# EAGLE board Kitty_PCB (EAGLE 9.2.2)
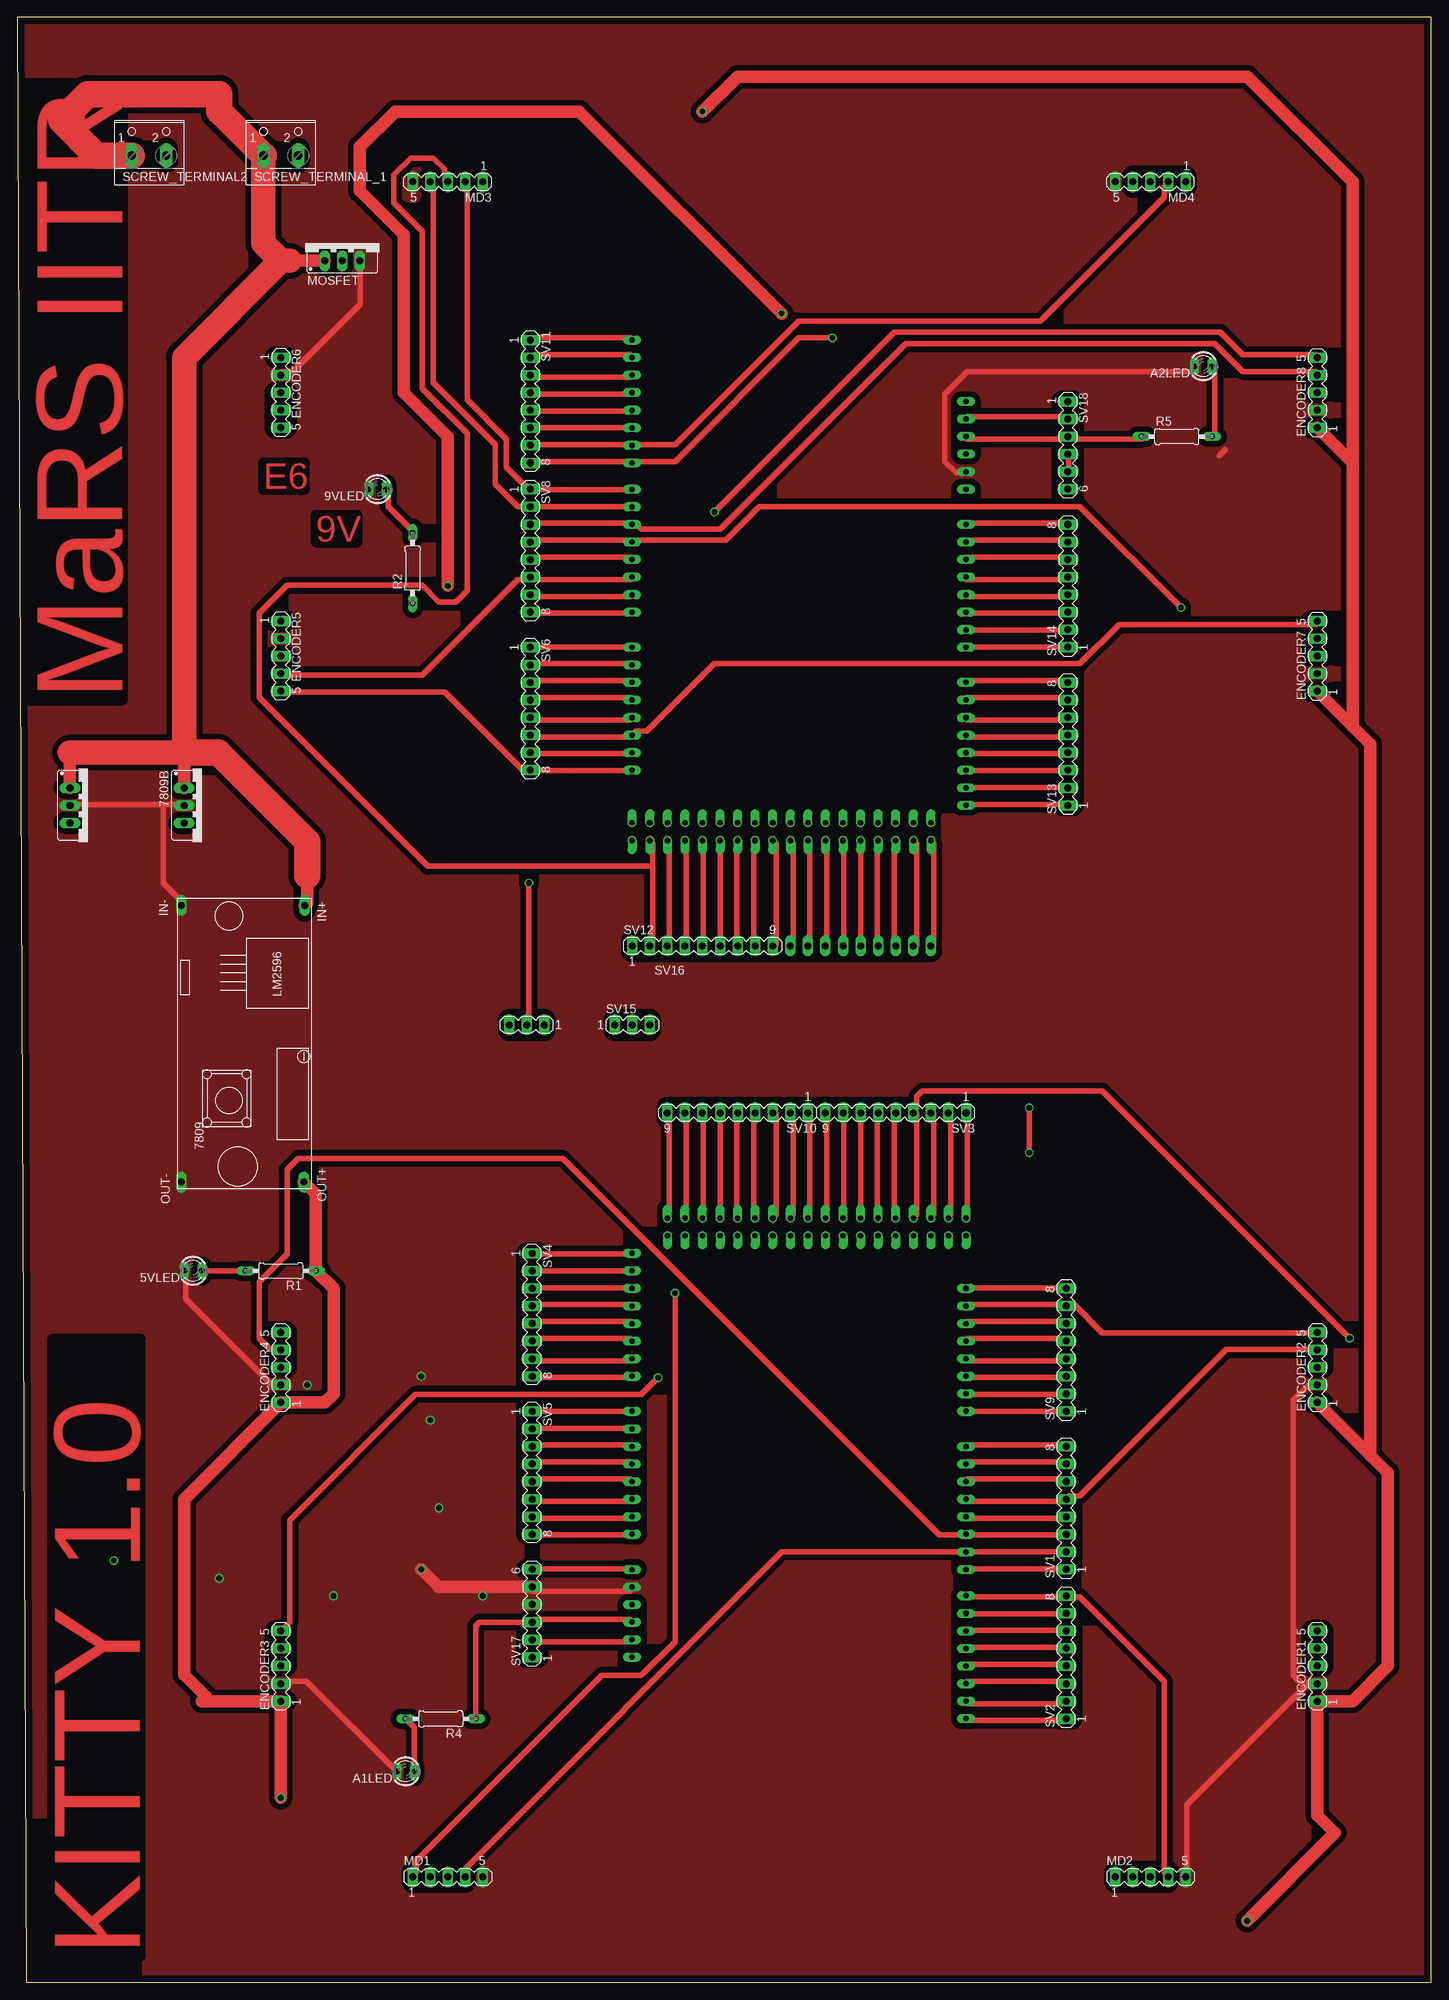
[diagram p0: board, top side]
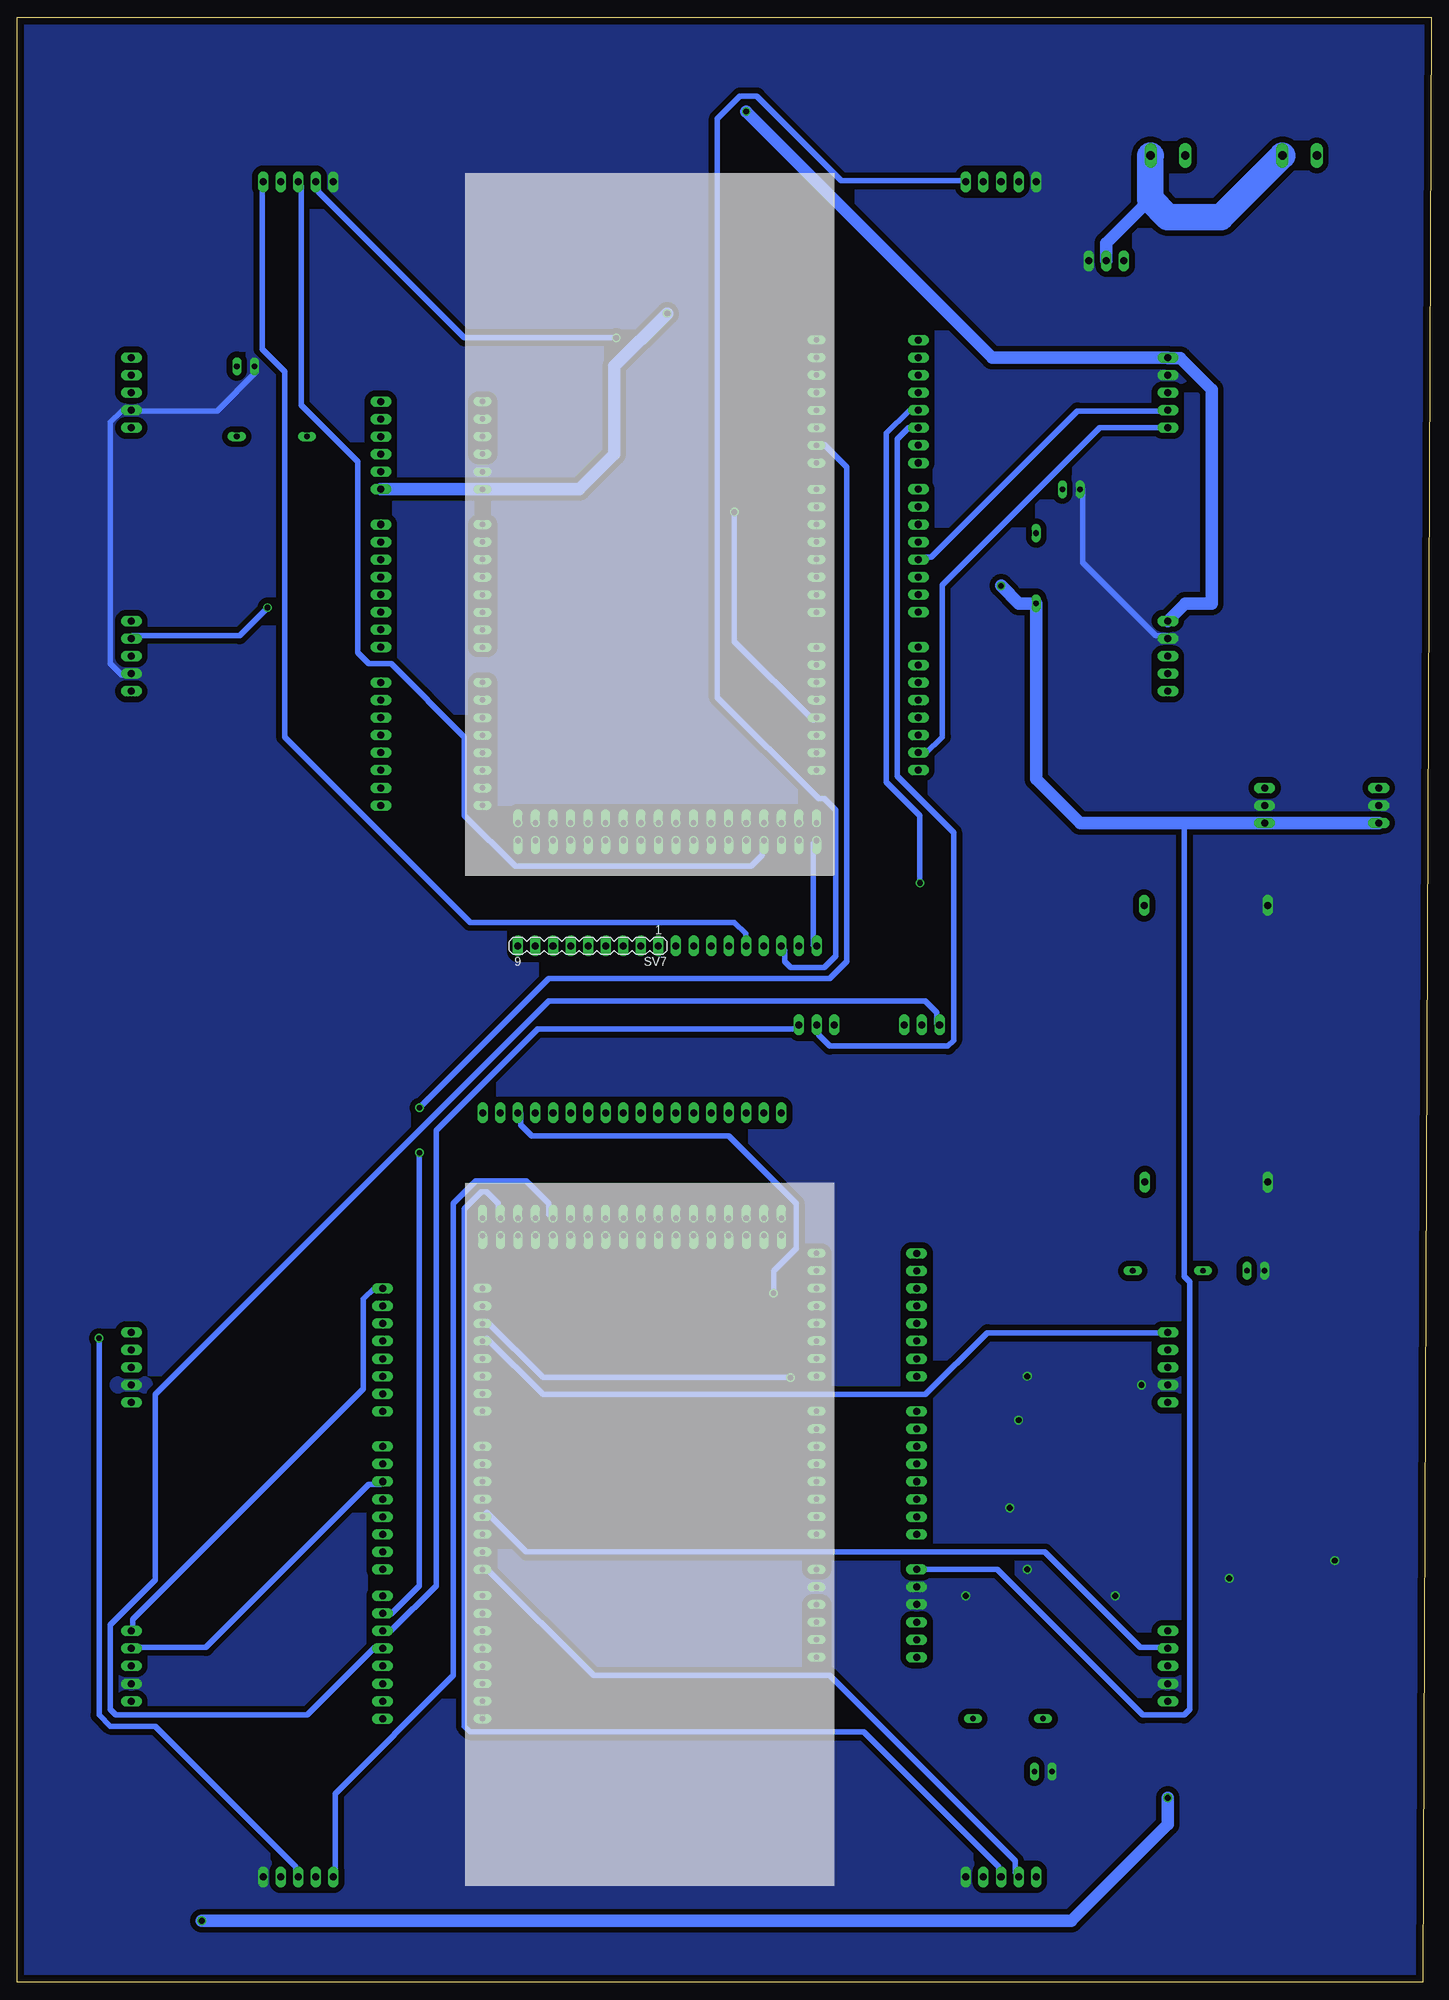
[diagram p1: board, bottom side, seen from below]

Size 204.45 x 284.15 mm. Coordinates in mm from the lower left corner, seen from the top.
Outline: 1.27,0 204.45,0 204.45,284.15 0,284.15 1.27,0
Copper layers (1*16): Top 0.035mm / dielectric 1.5mm / Bottom 0.035mm
Design rules "default *": minimum track width 10mil, minimum drill 24mil, track to track 8mil, track to pad 8mil, pad to pad 8mil, via to via 8mil, smd to smd 8mil, copper to edge 40mil, drill to drill 8mil, minimum pad ring 10mil, minimum via ring 8mil, stop-mask expansion 4mil, vias tented up to drill 0mil, thermal gap 10mil
Net classes: 0 default: width 0.813 mm, drill 0.813 mm, clearance 0.813 mm

## Footprints (pad centres in the part's own frame; a part is rotated, then mirrored left to right if it is on the bottom)
LED3MM = drill 0.813 long: A -1.27,0; K 1.27,0
78XXS = drill 1.016 long: GND 0,-2.54; IN -2.54,-2.54; OUT 2.54,-2.54
MEGABOX = drill 0.8 long: 0 12.7,24.13; 1 10.16,24.13; 2 7.62,24.13; 3 5.08,24.13; 3V3 -15.24,-24.13; 4 2.54,24.13; 5 0,24.13; 5V -12.7,-24.13; 6 -2.54,24.13; 7 -5.08,24.13; 8 -8.89,24.13; 9 -11.43,24.13; 10 -13.97,24.13; 11 -16.51,24.13; 12 -19.05,24.13; 13 -21.59,24.13; 14 17.78,24.13; 15 20.32,24.13; 16 22.86,24.13; 17 25.4,24.13; 18 27.94,24.13; 19 30.48,24.13; 20 33.02,24.13; 21 35.56,24.13; A0 0,-24.13; A1 2.54,-24.13; A2 5.08,-24.13; A3 7.62,-24.13; A4 10.16,-24.13; A5 12.7,-24.13; A6 15.24,-24.13; A7 17.78,-24.13; A8 22.86,-24.13; A9 25.4,-24.13; A10 27.94,-24.13; A11 30.48,-24.13; A12 33.02,-24.13; A13 35.56,-24.13; A14 38.1,-24.13; A15 40.64,-24.13; AREF -26.67,24.13; GND@1 -24.13,24.13; GND@2 -10.16,-24.13; GND@3 -7.62,-24.13; RESET -17.78,-24.13; VIN -5.08,-24.13 | drill 0.8 offset: 22 43.18,21.59; 23 45.72,21.59; 24 43.18,19.05; 25 45.72,19.05; 26 43.18,16.51; 27 45.72,16.51; 28 43.18,13.97; 29 45.72,13.97; 30 43.18,11.43; 31 45.72,11.43; 32 43.18,8.89; 33 45.72,8.89; 34 43.18,6.35; 35 45.72,6.35; 36 43.18,3.81; 37 45.72,3.81; 38 43.18,1.27; 39 45.72,1.27; 40 43.18,-1.27; 41 45.72,-1.27; 42 43.18,-3.81; 43 45.72,-3.81; 44 43.18,-6.35; 45 45.72,-6.35; 46 43.18,-8.89; 47 45.72,-8.89; 48 43.18,-11.43; 49 45.72,-11.43; 50 43.18,-13.97; 51 45.72,-13.97; 52 43.18,-16.51; 53 45.72,-16.51; GND@4 43.18,24.13; GND@5 45.72,24.13; GND@6 43.18,-19.05; GND@7 45.72,-19.05
MA05-1 = drill 1.016 long: 1 -5.08,0; 2 -2.54,0; 3 0,0; 4 2.54,0; 5 5.08,0
0207/10 = drill 0.813 long: 1 -5.08,0; 2 5.08,0
POWER_CONNECTOR = drill 1.194 long: 1 -2.5,-1.27; 2 2.5,-1.27
MA08-1 = drill 1.016 long: 1 -8.89,0; 2 -6.35,0; 3 -3.81,0; 4 -1.27,0; 5 1.27,0; 6 3.81,0; 7 6.35,0; 8 8.89,0
MA09-1 = drill 1.016 long: 1 -10.16,0; 2 -7.62,0; 3 -5.08,0; 4 -2.54,0; 5 0,0; 6 2.54,0; 7 5.08,0; 8 7.62,0; 9 10.16,0
MA03-1 = drill 1.016 long: 1 -2.54,0; 2 0,0; 3 2.54,0
MA06-1 = drill 1.016 long: 1 -6.35,0; 2 -3.81,0; 3 -1.27,0; 4 1.27,0; 5 3.81,0; 6 6.35,0
BUCK_CONVERTER = drill 1.016 long: IN+ -18.558,7.255; IN- -18.558,-10.618; OUT+ 21.442,7.128; OUT- 21.442,-10.618

## Placement (x,y rotation side)
5VLED  LED  [LED3MM]  25.4,102.87 180 top
9VLED  LED  [LED3MM]  52.07,215.9 180 top
7809  [78XXS]  10.16,170.18 270 top
7809B  [78XXS]  26.67,170.18 270 top
A1LED  LED  [LED3MM]  56.13,30.48 180 top
A2LED  LED  [LED3MM]  171.45,233.68 180 top
ARDUINO1  MEGA_DEVICE  [MEGABOX]  113.03,64.77 90 bottom
ARDUINO2  MEGA_DEVICE  [MEGABOX]  113.03,210.82 270 bottom
ENCODER1  [MA05-1]  187.96,45.72 90 top
ENCODER2  [MA05-1]  187.96,88.9 90 top
ENCODER3  [MA05-1]  38.1,45.72 90 top
ENCODER4  [MA05-1]  38.1,88.9 90 top
ENCODER5  [MA05-1]  38.1,191.77 270 top
ENCODER6  [MA05-1]  38.1,229.87 270 top
ENCODER7  [MA05-1]  187.96,191.77 90 top
ENCODER8  [MA05-1]  187.96,229.87 90 top
MD1  [MA05-1]  62.23,15.24 0 top
MD2  [MA05-1]  163.83,15.24 0 top
MD3  [MA05-1]  62.23,260.35 180 top
MD4  [MA05-1]  163.83,260.35 180 top
MOSFET  [78XXS]  46.99,251.46 0 top
R1  [0207/10]  38.1,102.87 180 top
R2  [0207/10]  57.15,204.47 90 top
R4  [0207/10]  61.21,38.1 180 top
R5  [0207/10]  167.64,223.52 0 top
SCREW_TERMINAL2  [POWER_CONNECTOR]  19.05,265.43 0 top
SCREW_TERMINAL_1  [POWER_CONNECTOR]  38.1,265.43 0 top
SV1  [MA08-1]  151.64,68.58 90 top
SV2  [MA08-1]  151.64,46.99 90 top
SV3  [MA09-1]  127,125.73 180 top
SV4  [MA08-1]  74.42,96.52 270 top
SV5  [MA08-1]  74.42,73.66 270 top
SV6  [MA08-1]  74.17,184.15 270 top
SV7  [MA09-1]  121.92,149.86 180 bottom
SV8  [MA08-1]  74.17,207.01 270 top
SV9  [MA08-1]  151.64,91.44 90 top
SV10  [MA09-1]  104.14,125.73 180 top
SV11  [MA08-1]  74.17,228.6 270 top
SV12  [MA09-1]  99.06,149.86 0 top
SV13  [MA08-1]  151.89,179.07 90 top
SV14  [MA08-1]  151.89,201.93 90 top
SV15  [MA03-1]  88.9,138.43 0 top
SV16  [MA03-1]  73.66,138.43 180 top
SV17  [MA06-1]  74.42,53.34 90 top
SV18  [MA06-1]  151.89,222.25 270 top
U$1  [BUCK_CONVERTER]  34.29,137.16 270 top

## Library data of the parts
5VLED 9VLED A1LED A2LED = robocon; MF: VISHAY SEMICONDUCTOR; OC_FARNELL: 1612437
7809 7809B MOSFET R1 R2 R4 R5 U$1 = robocon
ARDUINO1 ARDUINO2 = ArduinoMegaSymbol
ENCODER1-ENCODER8 MD1-MD4 SV1-SV18 = robocon; OC_FARNELL: unknown; OC_NEWARK: unknown
SCREW_TERMINAL2 SCREW_TERMINAL_1 = robocon; MPN: 237-102; OC_FARNELL: unknown; OC_NEWARK: 70K9898

## Nets
0A1: ARDUINO1.0 SV1.8
0A2: ARDUINO2.0 SV8.8
1A1: ARDUINO1.1 SV1.7
1A2: ARDUINO2.1 SV8.7
2A1: ARDUINO1.2 ENCODER1.4 SV1.6
2A2: ARDUINO2.2 ENCODER5.4 SV8.6
3A1: ARDUINO1.3 ENCODER2.4 SV1.5
3A2: ARDUINO2.3 ENCODER6.4 SV8.5
4A1: ARDUINO1.4 ENCODER3.4 SV1.4
4A2: ARDUINO2.4 ENCODER7.4 SV8.4
5A1: ARDUINO1.5 ENCODER4.4 SV1.3
5A2: ARDUINO2.5 ENCODER8.4 SV8.3
5V: ENCODER1.1 ENCODER2.1 ENCODER3.1 ENCODER4.1 ENCODER5.1 ENCODER6.1 ENCODER7.1 ENCODER8.1 R1.1 U$1.OUT+
6A1: ARDUINO1.6 MD1.4 SV1.2
6A2: ARDUINO2.6 MD3.4 SV8.2
7A1: ARDUINO1.7 MD1.2 SV1.1
7A2: ARDUINO2.7 MD3.2 SV8.1
8A1: ARDUINO1.8 MD2.4 SV2.8
8A2: ARDUINO2.8 MD4.4 SV11.8
9A1: MD2.2
9A2: ARDUINO1.9 ARDUINO2.9 MD4.2 SV2.7 SV11.7
9V: 7809.OUT 7809B.OUT ARDUINO1.VIN ARDUINO2.VIN R2.1 SV17.6 SV18.6
12A1: ARDUINO1.12 SV2.4
12A2: ARDUINO2.12 SV11.4
12V_IN_GND: MOSFET.GND SCREW_TERMINAL2.2 SCREW_TERMINAL_1.2
12V_OUT: 7809.IN 7809B.IN MOSFET.IN SCREW_TERMINAL2.1 SCREW_TERMINAL_1.1 U$1.IN+
13A1: ARDUINO1.13 SV2.3
13A2: ARDUINO2.13 SV11.3
14A1: ARDUINO1.14 SV9.1
14A2: ARDUINO2.14 SV6.1
15A1: ARDUINO1.15 SV9.2
15A2: ARDUINO2.15 SV6.2
16A1: ARDUINO1.16 SV9.3
16A2: ARDUINO2.16 SV6.3
17A1: ARDUINO1.17 SV9.4
17A2: ARDUINO2.17 SV6.4
18A1: ARDUINO1.18 ENCODER4.5 SV9.5
18A2: ARDUINO2.18 ENCODER8.5 SV6.5
19A1: ARDUINO1.19 ENCODER3.5 SV9.6
19A2: ARDUINO2.19 ENCODER7.5 SV6.6
20A1: ARDUINO1.20 ENCODER2.5 SV9.7
20A2: ARDUINO2.20 ENCODER6.5 SV6.7
21A1: ARDUINO1.21 ENCODER1.5 SV9.8
21A2: ARDUINO2.21 ENCODER5.5 SV6.8
23A1: ARDUINO1.23 MD1.3 SV3.2
23A2: ARDUINO2.23 MD3.3 SV12.2
25A1: ARDUINO1.25 MD1.1 SV3.3
25A2: ARDUINO2.25 MD3.1 SV12.3
27A1: ARDUINO1.27 MD2.3 SV3.4
27A2: ARDUINO2.27 MD4.3 SV12.4
29A1: ARDUINO1.29 MD2.1 SV3.5
29A2: ARDUINO2.29 MD4.1 SV12.5
31A1: ARDUINO1.31 SV3.6
31A2: ARDUINO2.31 SV12.6
33A1: ARDUINO1.33 SV3.7
33A2: ARDUINO2.33 SV12.7
35A1: ARDUINO1.35 SV3.8
35A2: ARDUINO2.35 SV12.8
37A1: ARDUINO1.37 SV3.9
37A2: ARDUINO2.37 SV12.9
A1SC1: ARDUINO1.10 SV2.6 SV15.3
A1SC2: ARDUINO1.11 SV2.5 SV16.3
A2SC1: ARDUINO2.10 SV11.6 SV15.2
A2SC2: ARDUINO2.11 SV11.5 SV16.2
GND: 5VLED.K 9VLED.K 7809.GND 7809B.GND A1LED.K A2LED.K ARDUINO1.GND@3 ARDUINO2.GND@3 ENCODER1.2 ENCODER2.2 ENCODER3.2 ENCODER4.2 ENCODER5.2 ENCODER6.2 ENCODER7.2 ENCODER8.2 MD1.5 MD2.5 MD3.5 MD4.5 MOSFET.OUT SV17.4 SV17.5 U$1.IN- U$1.OUT-
N$1: ARDUINO1.3V3 SV17.2
N$2: ARDUINO1.5V R4.1 SV17.3
N$3: 5VLED.A R1.2
N$4: SV18.4 SV18.5
N$5: ARDUINO2.3V3 SV18.2
N$6: ARDUINO2.5V R5.1 SV18.3
N$7: A1LED.A R4.2
N$8: A2LED.A R5.2
N$19: 9VLED.A R2.2
N$20: ARDUINO1.GND@5 SV3.1
N$24: ARDUINO1.GND@1 SV2.2
N$25: ARDUINO1.AREF SV2.1
N$26: ARDUINO1.A15 SV4.1
N$27: ARDUINO1.A14 SV4.2
N$28: ARDUINO1.A13 SV4.3
N$29: ARDUINO1.A12 SV4.4
N$30: ARDUINO1.A11 SV4.5
N$31: ARDUINO1.A10 SV4.6
N$32: ARDUINO1.A9 SV4.7
N$33: ARDUINO1.A8 SV4.8
N$34: ARDUINO1.A7 SV5.1
N$35: ARDUINO1.A6 SV5.2
N$36: ARDUINO1.A5 SV5.3
N$37: ARDUINO1.A4 SV5.4
N$38: ARDUINO1.A3 SV5.5
N$39: ARDUINO1.A2 SV5.6
N$40: ARDUINO1.A1 SV5.7
N$41: ARDUINO1.A0 SV5.8
N$59: SV15.1
N$64: ARDUINO2.GND@1 SV11.2
N$65: ARDUINO2.AREF SV11.1
N$66: ARDUINO2.A15 SV13.1
N$67: ARDUINO2.A14 SV13.2
N$68: ARDUINO2.A13 SV13.3
N$69: ARDUINO2.A12 SV13.4
N$70: ARDUINO2.A11 SV13.5
N$71: ARDUINO2.A10 SV13.6
N$72: ARDUINO2.A9 SV13.7
N$73: ARDUINO2.A8 SV13.8
N$74: ARDUINO2.A7 SV14.1
N$75: ARDUINO2.A6 SV14.2
N$76: ARDUINO2.A5 SV14.3
N$77: ARDUINO2.A4 SV14.4
N$78: ARDUINO2.A3 SV14.5
N$79: ARDUINO2.A2 SV14.6
N$80: ARDUINO2.A1 SV14.7
N$81: ARDUINO2.A0 SV14.8
N$82: SV16.1
N$88: ARDUINO1.39 SV10.1
N$89: ARDUINO1.41 SV10.2
N$90: ARDUINO1.43 SV10.3
N$91: ARDUINO1.45 SV10.4
N$92: ARDUINO1.47 SV10.5
N$93: ARDUINO1.49 SV10.6
N$94: ARDUINO1.51 SV10.7
N$95: ARDUINO1.53 SV10.8
N$96: ARDUINO1.GND@7 SV10.9
N$97: ARDUINO2.GND@5 SV12.1
N$106: ARDUINO2.39 SV7.1
N$107: ARDUINO2.41 SV7.2
N$108: ARDUINO2.43 SV7.3
N$109: ARDUINO2.45 SV7.4
N$110: ARDUINO2.47 SV7.5
N$111: ARDUINO2.49 SV7.6
N$112: ARDUINO2.51 SV7.7
N$113: ARDUINO2.53 SV7.8
N$114: ARDUINO2.GND@7 SV7.9
N$118: ENCODER1.3
N$122: ENCODER2.3
N$126: ENCODER4.3
N$130: ENCODER3.3

## Tracks (layer width: path | path; a pad name or v marks a point on that pad's centre or on a via)
0A1
  Top 0.813: ARDUINO1.0 137.36,77.67 151.18,77.67 SV1.8
0A2
  Top 0.813: ARDUINO2.0 88.59,197.97 74.78,197.97 SV8.8
1A1
  Top 0.813: ARDUINO1.1 137.36,75.24 151.18,75.24 SV1.7
1A2
  Top 0.813: ARDUINO2.1 88.59,200.41 74.78,200.41 SV8.7
2A1
  Top 0.813: ARDUINO1.2 137.36,72.8 151.18,72.8 SV1.6
  Bottom 0.813: ENCODER1.4 187.76,48.41 177.19,48.41 153.62,71.98 151.99,71.98 SV1.6
2A2
  Top 0.813: ARDUINO2.2 88.59,202.84 74.78,202.84 SV8.6 73.97,202.84 72.34,202.84 58.52,189.03 38.2,189.03 ENCODER5.4
3A1
  Top 0.813: ARDUINO1.3 137.36,69.55 151.18,69.55 SV1.5 151.99,70.36 153.62,70.36 174.75,91.49 187.76,91.49 ENCODER2.4
3A2
  Top 0.813: ARDUINO2.3 88.59,206.1 74.78,206.1 SV8.5
  Bottom 0.813: ENCODER6.4 38.2,227.23 51.21,227.23 72.34,206.1 73.97,206.1 SV8.5
4A1
  Top 0.813: ARDUINO1.4 137.36,67.11 151.18,67.11 SV1.4
  Bottom 0.813: ENCODER3.4 38.2,48.41 42.06,48.41 55.88,62.23 130.86,62.23 136.55,67.92 ARDUINO1.4
4A2  (via drill 0.81)
  Top 0.813: SV8.4 74.78,208.53 88.59,208.53 ARDUINO2.4 89.41,208.53 102.41,208.53 107.29,213.41 153.62,213.41 v168.25,198.78
  Bottom 0.813: v168.25,198.78 172.31,194.72 187.76,194.72 ENCODER7.4
5A1
  Top 0.813: SV1.3 151.18,64.67 137.36,64.67 ARDUINO1.5 136.55,64.67 133.3,64.67 78.84,119.13 40.64,119.13 39.01,117.5 39.01,105.31 34.95,101.24 34.95,93.12 36.58,91.49 37.39,91.49 ENCODER4.4
5A2
  Top 0.813: SV8.3 74.78,210.97 88.59,210.97 ARDUINO2.5 89.41,210.97 90.22,210.16 101.6,210.16 128.42,236.98 173.13,236.98 177.19,232.92 187.76,232.92 ENCODER8.4
5V  (via drill 0.81, 0.85)
  Top 1.778: U$1.OUT+ 43.18,113.96 R1.1 45.72,100.33 45.72,85.09 44.45,83.82 ENCODER4.1 24.13,69.85 24.13,44.45 27.3,41.28 26.67,40.64 ENCODER3.1 v38.1,26.67 | v177.8,8.89 190.5,21.59 187.96,24.13 ENCODER1.1 193.04,40.64 198.12,45.72 198.12,73.66 195.58,76.2 | 195.58,76.2 ENCODER2.1 | 195.58,76.2 195.58,179.07 193.04,181.61 | 193.04,181.61 ENCODER7.1 | 193.04,181.61 193.04,219.71 | 193.04,219.71 ENCODER8.1 | 193.04,219.71 193.04,260.35 177.8,275.59 104.14,275.59 v99.06,270.51
  Bottom 1.778: v177.8,8.89 52.07,8.89 38.1,22.86 v38.1,26.67 | v99.06,270.51 63.5,234.95 ENCODER6.1 38.02,234.87 36.32,234.87 31.75,230.31 31.75,199.39 35.56,199.39 ENCODER5.1
6A1
  Top 0.813: SV1.2 ARDUINO1.6 110.54,62.23 65.02,16.71 65.02,15.9 MD1.4
6A2
  Top 0.813: ARDUINO2.6 88.59,213.41 74.78,213.41 SV8.2 73.97,213.41 72.34,213.41 69.09,216.66 69.09,222.35 60.15,231.29 60.15,259.74 MD3.4
7A1
  Top 0.813: ARDUINO1.7 137.36,59.79 151.18,59.79 SV1.1
  Bottom 0.813: MD1.2 60.15,15.9 60.15,17.53 86.97,44.35 121.11,44.35 136.55,59.79 ARDUINO1.7
7A2
  Top 0.813: ARDUINO2.7 88.59,215.85 74.78,215.85 SV8.1 73.97,215.85 70.71,219.1 70.71,223.16 65.02,228.85 65.02,259.74 MD3.2
8A1
  Top 0.813: ARDUINO1.8 137.36,55.73 151.18,55.73 SV2.8 151.99,55.73 153.62,55.73 165.81,43.54 165.81,15.9 MD2.4
8A2  (via drill 0.81)
  Top 0.813: SV11.8 74.78,219.91 88.59,219.91 ARDUINO2.8 89.41,219.91 95.1,219.91 112.98,237.8 v117.86,237.8
  Bottom 0.813: v117.86,237.8 139.8,237.8 160.93,258.93 160.93,259.74 MD4.4
9A2  (via drill 0.81)
  Top 0.813: ARDUINO1.9 137.36,53.29 151.18,53.29 SV2.7 | SV11.7 74.78,222.35 88.59,222.35 ARDUINO2.9 89.41,222.35 95.1,222.35 112.98,240.23 147.93,240.23 165.81,258.12 165.81,259.74 MD4.2 | v146.3,126.44 v146.3,119.94
  Bottom 0.813: v146.3,119.94 146.3,57.35 150.37,53.29 151.18,53.29 SV2.7 | v146.3,126.44 127.61,145.14 86.97,145.14 84.53,147.57 84.53,219.1 87.78,222.35 88.59,222.35 ARDUINO2.9
9V  (via drill 0.81)
  Top 0.813: ARDUINO1.VIN 88.59,59.79 74.78,59.79 SV17.6
  Top 1.778: v62.23,201.93 62.23,223.52 55.88,229.87 55.88,252.73 49.53,259.08 49.53,265.43 54.61,270.51 81.28,270.51 v110.49,241.3
  Bottom 0.813: SV17.6 62.74,59.69 59.31,56.26 41.71,38.66 35.76,38.66 34.95,39.47 34.95,101.24 35.76,102.06 35.76,167.64
  Bottom 1.778: 7809.OUT 7809B.OUT 35.76,167.64 50.8,167.64 57.15,173.99 R2.1 59.69,199.39 v62.23,201.93 | v110.49,241.3 118.11,233.68 118.11,220.98 123.19,215.9 ARDUINO2.VIN SV18.6
12A1
  Top 0.813: ARDUINO1.12 137.36,45.97 151.18,45.97 SV2.4
12A2
  Top 0.813: ARDUINO2.12 88.59,229.67 74.78,229.67 SV11.4
12V_IN_GND
  Bottom 1.778: 40.64,257.81 46.99,251.46 MOSFET.GND
  Bottom 3.835: SCREW_TERMINAL2.2 30.44,255.27 38.1,255.27 40.64,257.81 40.64,264.12 SCREW_TERMINAL_1.2
12V_OUT
  Top 1.778: 39.37,248.92 MOSFET.IN | 7.62,177.8 7809.IN | 24.13,177.8 7809B.IN | 41.91,160.02 41.91,156.08 U$1.IN+
  Top 3.556: SCREW_TERMINAL_1.1 35.56,264.12 35.56,251.46 38.1,248.92 | 38.1,248.92 39.37,248.92 | 38.1,248.92 24.13,234.95 24.13,177.8 7.62,177.8
  Top 3.81: 24.13,177.8 29.06,177.8 41.91,164.95 41.91,160.02
  Top 3.835: SCREW_TERMINAL2.1 11.43,264.16 6.35,269.24 10.16,273.05 29.21,273.05 29.21,270.55 SCREW_TERMINAL_1.1
13A1
  Top 0.813: ARDUINO1.13 137.36,43.54 151.18,43.54 SV2.3
13A2
  Top 0.813: ARDUINO2.13 88.59,232.11 74.78,232.11 SV11.3
14A1
  Top 0.813: SV9.1 ARDUINO1.14
14A2
  Top 0.813: ARDUINO2.14 88.59,193.09 74.78,193.09 SV6.1
15A1
  Top 0.813: ARDUINO1.15 137.36,84.99 151.18,84.99 SV9.2
15A2
  Top 0.813: ARDUINO2.15 88.59,190.65 74.78,190.65 SV6.2
16A1
  Top 0.813: ARDUINO1.16 137.36,87.43 151.18,87.43 SV9.3
16A2
  Top 0.813: ARDUINO2.16 88.59,188.21 74.78,188.21 SV6.3
17A1
  Top 0.813: ARDUINO1.17 137.36,89.87 151.18,89.87 SV9.4
17A2
  Top 0.813: ARDUINO2.17 88.59,185.78 74.78,185.78 SV6.4
18A1
  Top 0.813: ARDUINO1.18 137.36,93.12 151.18,93.12 SV9.5
  Bottom 0.813: ENCODER4.5 38.2,93.93 64.21,93.93 73.15,84.99 128.42,84.99 136.55,93.12 ARDUINO1.18
18A2  (via drill 0.81)
  Top 0.813: ARDUINO2.18 88.59,182.52 74.78,182.52 SV6.5 | v100.79,212.6 126.8,238.61 173.94,238.61 177.19,235.36 187.76,235.36 ENCODER8.5
  Bottom 0.813: v100.79,212.6 100.79,193.9 89.41,182.52 ARDUINO2.18
19A1  (via drill 0.81)
  Top 0.813: ARDUINO1.19 137.36,95.56 151.18,95.56 SV9.6 | ENCODER3.5 39.37,52.07 39.37,66.8 57.56,84.99 90.22,84.99 v92.66,87.43
  Bottom 0.813: v92.66,87.43 128.42,87.43 136.55,95.56 ARDUINO1.19
19A2
  Top 0.813: SV6.6 74.78,180.09 88.59,180.09 ARDUINO2.19 89.41,180.9 91.03,180.9 100.79,190.65 153.62,190.65 159.31,196.34 187.76,196.34 ENCODER7.5
20A1
  Top 0.813: ARDUINO1.20 137.36,97.99 151.18,97.99 SV9.7 151.99,97.99 152.81,97.99 156.87,93.93 187.76,93.93 ENCODER2.5
20A2
  Top 0.813: ARDUINO2.20 88.59,177.65 74.78,177.65 SV6.7
  Bottom 0.813: ENCODER6.5 47.95,224.79 70.71,202.03 70.71,180.09 73.15,177.65 73.97,177.65 SV6.7
21A1
  Top 0.813: ARDUINO1.21 137.36,100.43 151.18,100.43 SV9.8
  Bottom 0.813: ENCODER1.5 187.76,50.85 187.76,52.48 154.43,85.8 154.43,98.81 152.81,100.43 151.99,100.43 SV9.8
21A2
  Top 0.813: ARDUINO2.21 88.59,175.21 74.78,175.21 SV6.8 73.97,175.21 73.15,175.21 61.77,186.59 38.2,186.59 ENCODER5.5
23A1
  Top 0.813: ARDUINO1.23 134.93,111 134.93,125.63 SV3.2
  Bottom 0.813: MD1.3 62.59,15.9 62.59,16.71 82.09,36.22 138.99,36.22 139.8,37.03 139.8,111.81 137.36,114.25 136.55,114.25 134.93,112.62 134.93,111 ARDUINO1.23
23A2
  Top 0.813: 91.85,161.39 91.85,150.01 SV12.2 | 91.85,161.39 91.85,164.64 ARDUINO2.23 | 91.85,161.39 59.33,161.39 34.95,185.78 34.95,197.97 39.01,202.03 58.52,202.03 60.96,199.59 63.4,199.59 65.02,201.22 65.02,223.98 58.52,230.48 58.52,253.24 54.46,257.3 54.46,261.37 56.9,263.8 60.15,263.8 61.77,262.18 61.77,260.55 MD3.3
25A1  (via drill 0.81)
  Top 0.813: ARDUINO1.25 132.49,111 132.49,125.63 SV3.3 | v95.1,99.62 95.1,49.22 90.22,44.35 84.53,44.35 57.71,17.53 57.71,15.9 MD1.1
  Bottom 0.813: v95.1,99.62 95.1,102.87 91.85,106.12 91.85,112.62 101.6,122.38 130.05,122.38 131.67,124 131.67,125.63 SV3.3
25A2
  Top 0.813: ARDUINO2.25 94.28,164.64 94.28,150.01 SV12.3
  Bottom 0.813: MD3.1 67.46,260.55 85.34,260.55 97.54,272.75 99.97,272.75 103.23,269.49 103.23,185.78 88.59,171.15 87.78,171.15 86.16,169.52 86.16,148.39 87.78,146.76 92.66,146.76 93.47,147.57 93.47,149.2 SV12.3
27A1  (via drill 0.81)
  Top 0.813: ARDUINO1.27 130.05,111 130.05,125.63 SV3.4 130.05,126.44 130.05,128.07 130.86,128.88 156.87,128.88 v192.63,93.12
  Bottom 0.813: v192.63,93.12 192.63,38.66 191.01,37.03 184.51,37.03 164.19,16.71 164.19,15.9 MD2.3
27A2
  Top 0.813: ARDUINO2.27 96.72,164.64 96.72,150.01 SV12.4
  Bottom 0.813: MD4.3 163.37,259.74 163.37,228.04 155.25,219.91 155.25,192.28 153.62,190.65 150.37,190.65 139.8,180.09 139.8,168.71 132.49,161.39 98.35,161.39 96.72,163.02 96.72,164.64 ARDUINO2.27
29A1
  Top 0.813: ARDUINO1.29 126.8,111 126.8,125.63 SV3.5
  Bottom 0.813: MD2.1 158.5,15.9 158.5,27.28 141.43,44.35 141.43,112.62 138.18,115.88 130.86,115.88 127.61,112.62 127.61,111 ARDUINO1.29
29A2
  Top 0.813: ARDUINO2.29 99.16,164.64 99.16,150.01 SV12.5
  Bottom 0.813: MD4.1 169.06,259.74 169.06,236.17 165.81,232.92 165.81,180.09 138.99,153.26 100.79,153.26 99.16,151.64 99.16,150.01 SV12.5
31A1
  Top 0.813: ARDUINO1.31 124.36,111 124.36,125.63 SV3.6
31A2
  Top 0.813: SV12.6 ARDUINO2.31
33A1
  Top 0.813: SV3.7 ARDUINO1.33
33A2
  Top 0.813: ARDUINO2.33 104.04,164.64 104.04,150.01 SV12.7
35A1
  Top 0.813: ARDUINO1.35 119.48,111 119.48,125.63 SV3.8
35A2
  Top 0.813: ARDUINO2.35 106.48,164.64 106.48,150.01 SV12.8
37A1
  Top 0.813: ARDUINO1.37 117.04,111 117.04,125.63 SV3.9
37A2
  Top 0.813: ARDUINO2.37 109.73,164.64 109.73,150.01 SV12.9
A1SC1
  Top 0.813: ARDUINO1.10 137.36,50.85 151.18,50.85 SV2.6
  Bottom 0.813: SV15.3 91.85,137.82 129.24,137.82 143.87,123.19 143.87,57.35 150.37,50.85 151.18,50.85 SV2.6
A1SC2
  Top 0.813: ARDUINO1.11 137.36,48.41 151.18,48.41 SV2.5
  Bottom 0.813: SV16.3 71.53,138.63 71.53,140.26 73.15,141.88 127.61,141.88 184.51,84.99 184.51,58.17 191.01,51.66 191.01,39.47 190.19,38.66 162.56,38.66 152.81,48.41 151.99,48.41 SV2.5
A2SC1
  Top 0.813: SV11.6 ARDUINO2.10
  Bottom 0.813: SV11.6 75.59,224.79 77.22,223.16 77.22,174.4 69.09,166.27 69.09,136.19 69.9,135.38 86.97,135.38 88.59,137.01 88.59,137.82 SV15.2
A2SC2  (via drill 0.81)
  Top 0.813: ARDUINO2.11 88.59,227.23 74.78,227.23 SV11.5 | v73.97,158.95 73.97,138.63 SV16.2
  Bottom 0.813: v73.97,158.95 73.97,168.71 78.84,173.58 78.84,223.98 75.59,227.23 74.78,227.23 SV11.5
GND  (via drill 0.85)
  Top 0.813: 21.13,170.33 23.57,170.33 7809B.GND | 21.13,170.33 8.13,170.33 7809.GND | 74.42,56.54 88.59,56.54 ARDUINO1.GND@3 | ARDUINO2.GND@3 136.55,218.29 135.74,218.29 134.11,219.91 134.11,229.67 137.36,232.92 169.88,232.92 A2LED.K | ENCODER3.2 38.2,43.54 41.81,43.54 A1LED.K | 186.13,42.72 169.06,25.65 169.06,15.9 MD2.5 | 186.13,42.72 186.94,43.54 187.76,43.54 ENCODER1.2 | ENCODER4.2 37.39,86.61 36.58,86.61 24.38,98.81 24.38,102.87 5VLED.K | 186.13,42.72 184.51,44.35 184.51,84.18 186.94,86.61 187.76,86.61 ENCODER2.2 | ENCODER6.2 38.2,232.92 39.83,232.92 49.58,242.67 49.58,248.36 MOSFET.OUT | 21.13,170.33 21.13,158.95 23.57,156.51 U$1.IN- | 174.62,221.62 173.74,220.78
  Top 1.778: SV17.5 60.96,57.15 v58.42,59.69
  Bottom 0.813: ENCODER7.2 188.57,189.03 189.38,189.03 191.01,190.65 191.01,225.6 189.38,227.23 188.57,227.23 ENCODER8.2 187.76,227.23 175.56,227.23 169.88,232.92 A2LED.K | ENCODER5.2 38.2,194.72 39.83,194.72 50.39,205.28 50.39,215.85 9VLED.K | 74.42,54.92 74.78,54.92 SV17.4
  other vias: 41.91,86.36 59.69,81.28 58.42,87.63 29.21,58.42 13.97,60.96 45.72,55.88 67.31,55.88 60.96,68.58
  pour Bottom: -11.43,288.29 -11.43,-2.54 1.27,-15.24 204.47,-15.24 219.71,0 219.71,280.67 204.47,295.91 0,295.91 -2.54,298.45 -2.54,297.18
  pour Top: -15.24,290.83 -15.24,-1.27 -1.27,-15.24 199.39,-15.24 217.17,2.54 217.17,285.75 199.39,303.53 -2.54,303.53
N$1
  Top 0.813: ARDUINO1.3V3 88.59,49.22 74.78,49.22 SV17.2
N$2
  Top 0.813: ARDUINO1.5V 88.59,52.48 74.78,52.48 SV17.3 66.8,52.07 66.29,51.56 R4.1
N$3
  Top 0.813: R1.2 5VLED.A
N$4
  Top 0.813: SV18.5 151.99,219.1 151.99,220.73 SV18.4
N$5
  Top 0.813: ARDUINO2.3V3 137.36,226.42 151.18,226.42 SV18.2
N$6
  Top 0.813: ARDUINO2.5V 137.36,223.16 151.18,223.16 SV18.3 151.99,223.16 162.56,223.16 R5.1
N$7
  Top 0.813: R4.2 57.4,36.83 A1LED.A
N$8
  Top 0.813: R5.2 173.13,223.98 173.13,232.92 A2LED.A
N$19
  Top 0.813: 9VLED.A 53.65,215.85 53.65,213.41 56.9,210.16 R2.2
N$20
  Top 0.813: ARDUINO1.GND@5 137.36,111 137.36,125.63 SV3.1
N$24
  Top 0.813: ARDUINO1.GND@1 137.36,40.28 151.18,40.28 SV2.2
N$25
  Top 0.813: ARDUINO1.AREF 137.36,37.85 151.18,37.85 SV2.1
N$26
  Top 0.813: ARDUINO1.A15 88.59,105.31 74.78,105.31 SV4.1
N$27
  Top 0.813: SV4.2 ARDUINO1.A14
N$28
  Top 0.813: ARDUINO1.A13 88.59,100.43 74.78,100.43 SV4.3
N$29
  Top 0.813: ARDUINO1.A12 88.59,97.99 74.78,97.99 SV4.4
N$30
  Top 0.813: ARDUINO1.A11 88.59,95.56 74.78,95.56 SV4.5
N$31
  Top 0.813: ARDUINO1.A10 88.59,93.12 74.78,93.12 SV4.6
N$32
  Top 0.813: ARDUINO1.A9 88.59,89.87 74.78,89.87 SV4.7
N$33
  Top 0.813: ARDUINO1.A8 88.59,87.43 74.78,87.43 SV4.8
N$34
  Top 0.813: SV5.1 ARDUINO1.A7
N$35
  Top 0.813: ARDUINO1.A6 88.59,80.11 74.78,80.11 SV5.2
N$36
  Top 0.813: ARDUINO1.A5 88.59,77.67 74.78,77.67 SV5.3
N$37
  Top 0.813: ARDUINO1.A4 88.59,75.24 74.78,75.24 SV5.4
N$38
  Top 0.813: ARDUINO1.A3 88.59,72.8 74.78,72.8 SV5.5
N$39
  Top 0.813: ARDUINO1.A2 88.59,69.55 74.78,69.55 SV5.6
N$40
  Top 0.813: ARDUINO1.A1 88.59,67.11 74.78,67.11 SV5.7
N$41
  Top 0.813: ARDUINO1.A0 88.59,64.67 74.78,64.67 SV5.8
N$64
  Top 0.813: ARDUINO2.GND@1 88.59,235.36 74.78,235.36 SV11.2
N$65
  Top 0.813: ARDUINO2.AREF 88.59,237.8 74.78,237.8 SV11.1
N$66
  Top 0.813: ARDUINO2.A15 137.36,170.33 151.18,170.33 SV13.1
N$67
  Top 0.813: ARDUINO2.A14 137.36,172.77 151.18,172.77 SV13.2
N$68
  Top 0.813: ARDUINO2.A13 137.36,175.21 151.18,175.21 SV13.3
N$69
  Top 0.813: ARDUINO2.A12 137.36,177.65 151.18,177.65 SV13.4
N$70
  Top 0.813: ARDUINO2.A11 137.36,180.09 151.18,180.09 SV13.5
N$71
  Top 0.813: ARDUINO2.A10 137.36,182.52 151.18,182.52 SV13.6
N$72
  Top 0.813: ARDUINO2.A9 137.36,185.78 151.18,185.78 SV13.7
N$73
  Top 0.813: ARDUINO2.A8 137.36,188.21 151.18,188.21 SV13.8
N$74
  Top 0.813: ARDUINO2.A7 137.36,193.09 151.18,193.09 SV14.1
N$75
  Top 0.813: ARDUINO2.A6 137.36,195.53 151.18,195.53 SV14.2
N$76
  Top 0.813: ARDUINO2.A5 137.36,197.97 151.18,197.97 SV14.3
N$77
  Top 0.813: ARDUINO2.A4 137.36,200.41 151.18,200.41 SV14.4
N$78
  Top 0.813: ARDUINO2.A3 137.36,202.84 151.18,202.84 SV14.5
N$79
  Top 0.813: ARDUINO2.A2 137.36,206.1 151.18,206.1 SV14.6
N$80
  Top 0.813: ARDUINO2.A1 137.36,208.53 151.18,208.53 SV14.7
N$81
  Top 0.813: ARDUINO2.A0 137.36,210.97 151.18,210.97 SV14.8
N$88
  Top 0.813: ARDUINO1.39 114.61,111 114.61,125.63 SV10.1
N$89
  Top 0.813: ARDUINO1.41 112.17,111 112.17,125.63 SV10.2
N$90
  Top 0.813: ARDUINO1.43 109.73,111 109.73,125.63 SV10.3
N$91
  Top 0.813: ARDUINO1.45 106.48,111 106.48,125.63 SV10.4
N$92
  Top 0.813: ARDUINO1.47 104.04,111 104.04,125.63 SV10.5
N$93
  Top 0.813: SV10.6 ARDUINO1.49
N$94
  Top 0.813: ARDUINO1.51 99.16,111 99.16,125.63 SV10.7
N$95
  Top 0.813: ARDUINO1.53 96.72,111 96.72,125.63 SV10.8
N$96
  Top 0.813: ARDUINO1.GND@7 94.28,111 94.28,125.63 SV10.9
N$97
  Bottom 0.813: ARDUINO2.GND@5 89.41,164.64 89.41,150.01 SV12.1
N$106
  Top 0.813: ARDUINO2.39 112.17,164.64 112.17,150.01 SV7.1
N$107
  Top 0.813: ARDUINO2.41 114.61,164.64 114.61,150.01 SV7.2
N$108
  Top 0.813: ARDUINO2.43 117.04,164.64 117.04,150.01 SV7.3
N$109
  Top 0.813: ARDUINO2.45 119.48,164.64 119.48,150.01 SV7.4
N$110
  Top 0.813: SV7.5 ARDUINO2.47
N$111
  Top 0.813: ARDUINO2.49 124.36,164.64 124.36,150.01 SV7.6
N$112
  Top 0.813: ARDUINO2.51 126.8,164.64 126.8,150.01 SV7.7
N$113
  Top 0.813: ARDUINO2.53 130.05,164.64 130.05,150.01 SV7.8
N$114
  Top 0.813: ARDUINO2.GND@7 132.49,164.64 132.49,150.01 SV7.9

## Text on the board
Top: E6 | 9V | MaRS IITR | KITTY 1.0